# EAGLE board CT_schematic (EAGLE 7.6.0)

Size 100 x 80 mm. Coordinates in mm from the lower left corner, seen from the top.
Outline: 0,0 100,0 100,80 0,80 0,0
Copper layers (1*16): Top 0.035mm / dielectric 1.5mm / Bottom 0.035mm
Design rules "default": minimum track width 10mil, minimum drill 24mil, track to track 8mil, track to pad 8mil, pad to pad 8mil, via to via 8mil, smd to smd 8mil, copper to edge 40mil, drill to drill 8mil, minimum pad ring 10mil, minimum via ring 8mil, stop-mask expansion 4mil, vias tented up to drill 0mil, thermal gap 10mil

## Footprints (pad centres in the part's own frame; a part is rotated, then mirrored left to right if it is on the bottom)
C0603 = smd 0.8 x 0.8: 1 -0.762,0; 2 0.762,0
C0402 = smd 0.5 x 0.5: 1 -0.508,0; 2 0.508,0
C0805 = smd 1.2 x 1.3: 1 -1.016,0; 2 1.016,0
C1206 = smd 1.3 x 1.6: 1 -1.524,0; 2 1.524,0
L0603 = smd 0.8 x 0.8: 1 -0.762,0; 2 0.762,0
R0603 = smd 0.8 x 0.8: 1 -0.762,0; 2 0.762,0
WLCSP36 = smd 0.229 x 0.229: A1 -1,1; A2 -0.6,1; A3 -0.2,1; A4 0.2,1; A5 0.6,1; A6 1,1; B1 -1,0.6; B2 -0.6,0.6; B3 -0.2,0.6; B4 0.2,0.6; B5 0.6,0.6; B6 1,0.6; C1 -1,0.2; C2 -0.6,0.2; C3 -0.2,0.2; C4 0.2,0.2; C5 0.6,0.2; C6 1,0.2; D1 -1,-0.2; D2 -0.6,-0.2; D3 -0.2,-0.2; D4 0.2,-0.2; D5 0.6,-0.2; D6 1,-0.2; E1 -1,-0.6; E2 -0.6,-0.6; E3 -0.2,-0.6; E4 0.2,-0.6; E5 0.6,-0.6; E6 1,-0.6; F1 -1,-1; F2 -0.6,-1; F3 -0.2,-1; F4 0.2,-1; F5 0.6,-1; F6 1,-1
TDFN-8/6MM = smd 0.3 x 0.75: 1 0,0; 2 0.5,0; 3 1,0; 4 1.5,0; 5 1.5,3; 6 1,3; 7 0.5,3; 8 0,3
ABS07-32.768KHZ-7-T = smd 1.1 x 2.4: 1 -2.5,0; 2 0,0
WSON-8 = smd 0.3 x 0.6: 1 -0.75,0; 2 0.05,0; 3 0.85,0; 4 1.65,0; 5 1.65,3.8; 6 0.85,3.8; 7 0.05,3.8; 8 -0.75,3.8 | smd 3 x 2.6: PAD 0.45,1.9
DFN8_2X3MC = smd 0.813 x 0.305: 1 -1.398,0.75; 2 -1.398,0.25; 3 -1.398,-0.25; 4 -1.398,-0.75; 5 1.398,-0.75; 6 1.398,-0.25; 7 1.398,0.25; 8 1.398,0.75 | smd 1.753 x 1.549: 9 0,0
JST-2-SMD = smd 1 x 4.6: 1 -1,-3.7; 2 1,-3.7 | smd 1.6 x 3.4: NC1 -3.4,1.5; NC2 3.4,1.5
FCI_10118193-0001LF = smd 0.4 x 1.35: 1 -1.3,2.675; 2 -0.65,2.675; 3 0,2.675; 4 0.65,2.675; 5 1.3,2.675 | smd 1.6 x 1.4: 6 -3.2,2.45; 7 3.2,2.45 | smd 1.9 x 1.9: 8 -1.2,0; 9 1.2,0 | hole 0.5: -3.3,0; 3.3,0
SON-6 = smd 0.55 x 0.3: 1 -0.355,0.5 | smd 0.52 x 0.3: 2 -0.37,0; 3 -0.37,-0.5; 4 0.37,-0.5; 5 0.37,0; 6 0.37,0.5
SW_4-1437565-2 = smd 1.4 x 2.1: 1 -2.23,4.55; 2 -2.23,-4.55; 3 2.23,4.55; 4 2.23,-4.55
LGM67K-G1J2-24-Z = smd 0.8 x 1.4: A -2,0; C 0,0
NC7SZ125M5X = smd 1.3 x 0.7: 1 -1.3,0.95; 2 -1.3,0; 3 -1.3,-0.95; 4 1.3,-0.95; 5 1.3,0.95

## Placement (x,y rotation side)
C1  1e-07  [C0603]  -27.94,44.45 0 top  (outside the outline)
C2  1e-07  [C0603]  -31.75,44.45 0 top  (outside the outline)
C3  1e-07  [C0603]  -35.56,44.45 0 top  (outside the outline)
C4  1e-07  [C0603]  -39.37,44.45 0 top  (outside the outline)
C5  4.7e-06  [C0603]  -24.13,44.45 0 top  (outside the outline)
C6  1e-08  [C0603]  -43.18,44.45 0 top  (outside the outline)
C7  1e-06  [C0603]  -46.99,44.45 0 top  (outside the outline)
C8  1e-11  [C0402]  -38.1,49.53 0 top  (outside the outline)
C9  1e-11  [C0402]  -41.91,49.53 0 top  (outside the outline)
C10  1e-08  [C0402]  -45.72,49.53 0 top  (outside the outline)
C11  1e-06  [C0603]  -50.8,44.45 0 top  (outside the outline)
C12  1e-05  [C0805]  -34.29,33.02 0 top  (outside the outline)
C13  1e-07  [C0402]  -49.53,49.53 0 top  (outside the outline)
C14  1e-05  [C1206]  -16.51,33.02 0 top  (outside the outline)
C15  1e-05  [C1206]  -22.86,33.02 0 top  (outside the outline)
C16  1e-08  [C0402]  -53.34,49.53 0 top  (outside the outline)
F1  240.0  [L0603]  -54.61,44.45 0 top  (outside the outline)
R1  10000.0  [R0603]  -15.24,39.37 0 top  (outside the outline)
R2  1000.0  [R0603]  -15.24,49.53 0 top  (outside the outline)
R3  910.0  [R0603]  -19.05,49.53 0 top  (outside the outline)
R4  4700.0  [R0603]  -22.86,49.53 0 top  (outside the outline)
R5  2200.0  [R0603]  -26.67,49.53 0 top  (outside the outline)
R6  2200.0  [R0603]  -30.48,49.53 0 top  (outside the outline)
R7  10000.0  [R0603]  -20.32,39.37 0 top  (outside the outline)
R8  10000.0  [R0603]  -25.4,39.37 0 top  (outside the outline)
R9  10000.0  [R0603]  -30.48,39.37 0 top  (outside the outline)
R10  10000.0  [R0603]  -35.56,39.37 0 top  (outside the outline)
R11  100000.0  [R0603]  -39.37,33.02 0 top  (outside the outline)
R12  36000.0  [R0603]  -40.64,39.37 0 top  (outside the outline)
R13  100000.0  [R0603]  -44.45,33.02 0 top  (outside the outline)
R14  10000.0  [R0603]  -45.72,39.37 0 top  (outside the outline)
R15  10000.0  [R0603]  -50.8,39.37 0 top  (outside the outline)
R16  82000.0  [R0603]  -15.24,44.45 0 top  (outside the outline)
R17  300000.0  [R0603]  -49.53,33.02 0 top  (outside the outline)
R18  120000.0  [R0603]  -54.61,33.02 0 top  (outside the outline)
R19  2000.0  [R0603]  -34.29,49.53 0 top  (outside the outline)
R20  10000.0  [R0603]  -20.32,44.45 0 top  (outside the outline)
U1  STM32L051T8Y6  [WLCSP36]  -48.26,25.4 0 top  (outside the outline)
U2  24AA32AT-I/MNY  [TDFN-8/6MM]  -25.4,16.51 0 top  (outside the outline)
U3  ABS07-32.768KHZ-7-T  [ABS07-32.768KHZ-7-T]  -27.94,26.67 0 top  (outside the outline)
U4  LP2951ACSDX/NOPB  [WSON-8]  -44.45,15.24 0 top  (outside the outline)
U5  MCP73831T-2ACI/MC  [DFN8_2X3MC]  -20.32,53.34 0 top  (outside the outline)
U6  S2B-PH-SM4-TB(LF)(SN)  [JST-2-SMD]  -41.91,6.35 0 top  (outside the outline)
U7  10118193-0001LF  [FCI_10118193-0001LF]  -52.07,16.51 0 top  (outside the outline)
U8  TPS3895ADRYR  [SON-6]  -13.97,53.34 0 top  (outside the outline)
U9  4-1437565-2  [SW_4-1437565-2]  -27.94,6.35 0 top  (outside the outline)
U10  Q65110A2395  [LGM67K-G1J2-24-Z]  -36.83,25.4 0 top  (outside the outline)
U11  nc7sz125m5x  [NC7SZ125M5X]  -27.94,33.02 0 top  (outside the outline)

## Library data of the parts
C1-C16 F1 R1-R20 U1-U11 = circuit_tree

## Nets
CLK_CRYSTAL_U1_A6: C8.1 U1.A6 U3.1
CLK_CRYSTAL_U1_B6: C9.1 U1.B6 U3.2
GND: C1.2 C2.2 C3.2 C4.2 C5.2 C6.2 C7.2 C8.2 C9.2 C10.2 C11.2 C12.2 C13.2 C14.2 C15.2 C16.2 R2.2 R7.2 R10.2 R13.2 R16.2 R18.2 R19.2 U1.D6 U2.4 U2.7 U4.3 U4.4 U4.PAD U5.6 U5.9 U6.2 U7.5 U7.6 U7.7 U7.8 U7.9 U8.2 U10.C U11.1 U11.3
INPUT_USBPOWER_5V: C14.1 R20.2 U5.1 U5.2 U7.1
NET_U1_A4: R6.1 U1.A4 U2.5
NET_U1_B4: R5.1 U1.B4 U2.6
NET_U1_C5: R7.1 U1.C5
NET_U1_C6: R4.1 U1.C6 U11.4
NET_U1_D5: C6.1 C7.1 F1.1 U1.D5 U1.E6
NET_U1_F5: R3.1 U1.F5 U10.A
NET_U1_F6: R1.1 U1.F6 U9.3 U9.4
NET_U2_1: R8.1 U2.1
NET_U2_2: R9.1 U2.2
NET_U2_3: R10.1 U2.3
NET_U4_5: R11.1 U4.5
NET_U4_7: R12.2 R13.1 U4.7
NET_U5_5: R20.1 U5.5
NET_U5_8: R19.1 U5.8
NET_U8_1: R15.1 R16.1 U8.1
NET_U8_3: R17.2 R18.1 U8.3
NET_U8_4: R14.1 U8.4 U11.2
NET_U9_1: R2.1 U9.1 U9.2
VCC_S1_3V7: C11.1 C15.1 U4.8 U5.3 U5.4 U6.1
VCC_TIER1_1V8: C1.1 C2.1 C3.1 C4.1 C5.1 C10.1 C12.1 C13.1 C16.1 F1.2 R1.2 R3.2 R4.2 R5.2 R6.2 R8.2 R9.2 R11.2 R12.1 R14.2 R15.2 R17.1 U1.A5 U1.F1 U2.8 U4.1 U8.6 U11.5

## Tracks (layer width: path | path; a pad name or v marks a point on that pad's centre or on a via)
CLK_CRYSTAL_U1_A6  (2 unrouted)
CLK_CRYSTAL_U1_B6  (2 unrouted)
GND  (40 unrouted)
INPUT_USBPOWER_5V  (4 unrouted)
NET_U1_A4  (2 unrouted)
NET_U1_B4  (2 unrouted)
NET_U1_C5  (1 unrouted)
NET_U1_C6  (2 unrouted)
NET_U1_D5  (4 unrouted)
NET_U1_F5  (2 unrouted)
NET_U1_F6  (3 unrouted)
NET_U2_1  (1 unrouted)
NET_U2_2  (1 unrouted)
NET_U2_3  (1 unrouted)
NET_U4_5  (1 unrouted)
NET_U4_7  (2 unrouted)
NET_U5_5  (1 unrouted)
NET_U5_8  (1 unrouted)
NET_U8_1  (2 unrouted)
NET_U8_3  (2 unrouted)
NET_U8_4  (2 unrouted)
NET_U9_1  (2 unrouted)
VCC_S1_3V7  (5 unrouted)
VCC_TIER1_1V8  (27 unrouted)